# Altium PCB FEV-60_LED_Panel.PcbDoc
Units mil, origin at the board's own origin, x right, y up, seen from the top; angles counter-clockwise.
Board outline 5540 x 2365 mil, 2 copper layers (Top Layer, Bottom Layer); 50 components, 31 nets, 113 pads, 25 vias.
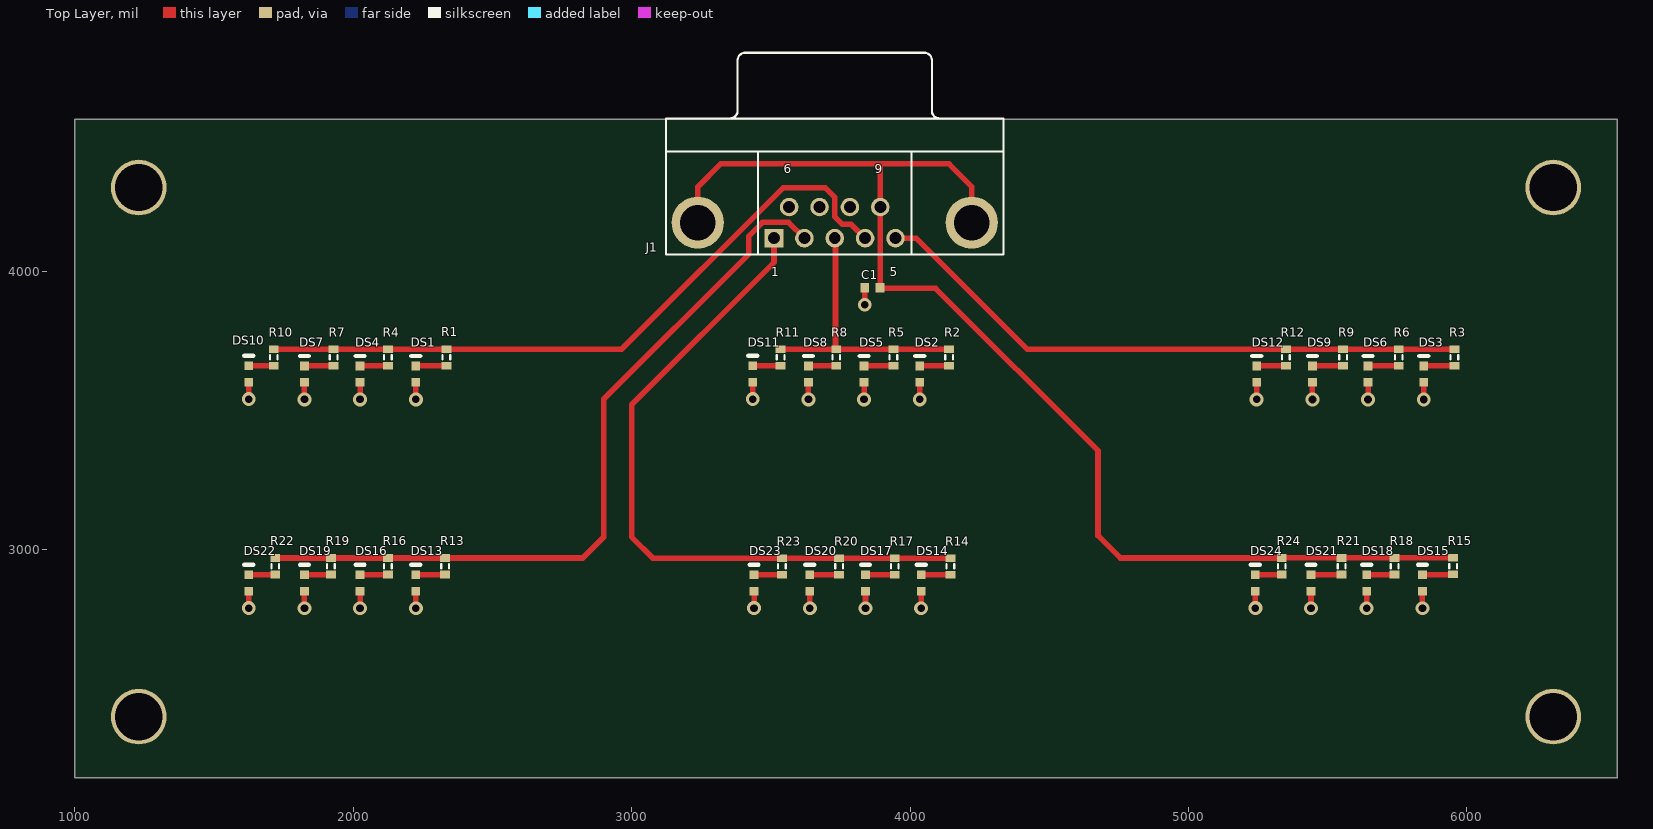
[diagram p0: Top Layer view]
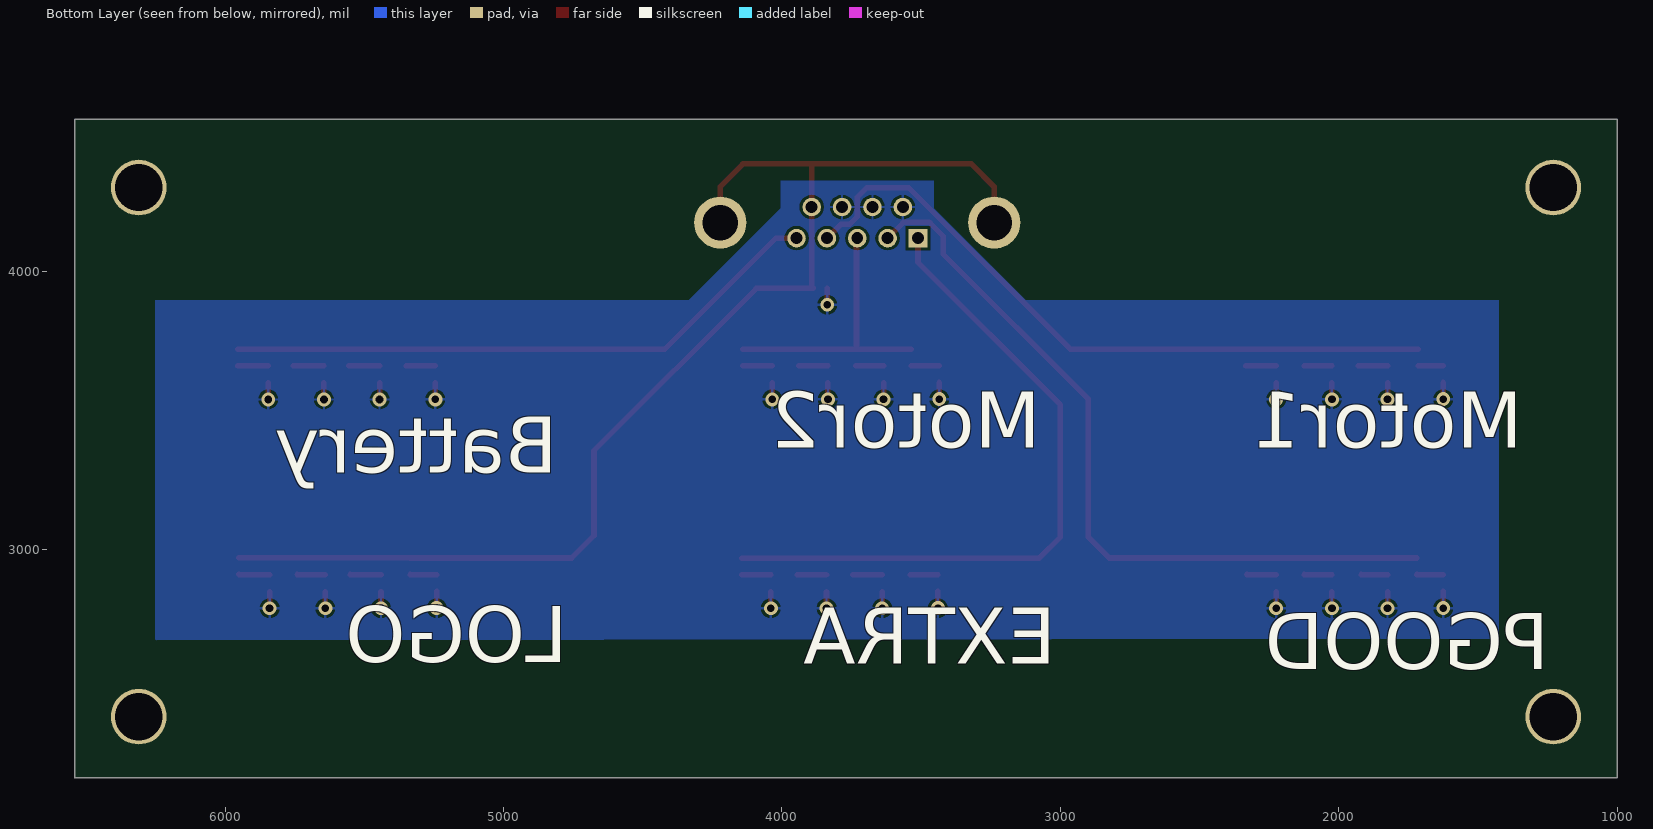
[diagram p1: Bottom Layer view, seen from below]

## Layer stack, top to bottom
Top Solder: solder mask 0.4, Solder Resist, Dk 3.5
Top Layer: signal copper 1.4
Dielectric 1: dielectric 12.6, FR-4, Dk 4.8
Bottom Layer: signal copper 1.4
Bottom Solder: solder mask 0.4, Solder Resist, Dk 3.5

## Board outline
1000,2180 1000,4545 6540,4545 6540,2180

## Design rules (kind name [scope] priority, off if disabled: settings)
Clearance [All] p1: gap=10 ignorepadtopadclearanceinfootprint=FALSE except(0: Arc-Hole Track-Hole SMDPad-Hole THPad-Hole Via-Hole Fill-Hole Poly-Hole Region-Hole Text-Hole)
PolygonConnect [All] p1: connectstyle=Relief reliefconductorwidth=10 reliefentries=4 polygonreliefangle="90 Angle" airgapwidth=10
RoutingVias [All] p1: holewidth=28 width=50 viastyle="Through Hole" minholewidth=28 minwidth=50 maxholewidth=28 maxwidth=50
SolderMaskExpansion [All] p1: expansion=4
Width [All] p1: maxlimit=50 minlimit=10 preferedwidth=20
30 further rules are at their usual default settings.

## Components (designator, comment, footprint, x,y, rotation, side; value= is the part's Value field where it differs from the comment)
C1 "Cap Semi" 1608[0603] 3865,3940 r180 top value=10uF
DS1 "HSMS-C190" AVAG-HSMX-C190_V 2225,3630 r90 top
DS2 "HSMS-C190" AVAG-HSMX-C190_V 4035,3630 r90 top
DS3 "HSMS-C190" AVAG-HSMX-C190_V 5845,3630 r90 top
DS4 "HSMS-C190" AVAG-HSMX-C190_V 2025,3630 r90 top
DS5 "HSMS-C190" AVAG-HSMX-C190_V 3835,3630 r90 top
DS6 "HSMS-C190" AVAG-HSMX-C190_V 5645,3630 r90 top
DS7 "HSMS-C190" AVAG-HSMX-C190_V 1825,3630 r90 top
DS8 "HSMS-C190" AVAG-HSMX-C190_V 3635,3630 r90 top
DS9 "HSMS-C190" AVAG-HSMX-C190_V 5445,3630 r90 top
DS10 "HSMS-C190" AVAG-HSMX-C190_V 1625,3630.47 r90 top
DS11 "HSMS-C190" AVAG-HSMX-C190_V 3435,3630.47 r90 top
DS12 "HSMS-C190" AVAG-HSMX-C190_V 5245,3630 r90 top
DS13 "HSMS-C190" AVAG-HSMX-C190_V 2225,2880 r90 top
DS14 "HSMS-C190" AVAG-HSMX-C190_V 4040,2880 r90 top
DS15 "HSMS-C190" AVAG-HSMX-C190_V 5840,2880 r90 top
DS16 "HSMS-C190" AVAG-HSMX-C190_V 2025,2880 r90 top
DS17 "HSMS-C190" AVAG-HSMX-C190_V 3840,2880 r90 top
DS18 "HSMS-C190" AVAG-HSMX-C190_V 5640,2880 r90 top
DS19 "HSMS-C190" AVAG-HSMX-C190_V 1825,2880 r90 top
DS20 "HSMS-C190" AVAG-HSMX-C190_V 3640,2880 r90 top
DS21 "HSMS-C190" AVAG-HSMX-C190_V 5440,2880 r90 top
DS22 "HSMS-C190" AVAG-HSMX-C190_V 1625,2880 r90 top
DS23 "HSMS-C190" AVAG-HSMX-C190_V 3440,2880 r90 top
DS24 "HSMS-C190" AVAG-HSMX-C190_V 5240,2880 r90 top
J1 "D Connector 9" DSUB1.385-2H9 3729.53,4548.11 r0 top
R1 "Res3" J1-0603 2335,3690 r90 top value=1K
R2 "Res3" J1-0603 4140,3690 r90 top value=1K
R3 "Res3" J1-0603 5955,3690 r90 top value=1K
R4 "Res3" J1-0603 2125,3690 r90 top value=1K
R5 "Res3" J1-0603 3940,3690 r90 top value=1K
R6 "Res3" J1-0603 5755,3690 r90 top value=1K
R7 "Res3" J1-0603 1930,3690 r90 top value=1K
R8 "Res3" J1-0603 3735,3690 r90 top value=1K
R9 "Res3" J1-0603 5555,3690 r90 top value=1K
R10 "Res3" J1-0603 1715,3690 r90 top value=1K
R11 "Res3" J1-0603 3535,3690 r90 top value=1K
R12 "Res3" J1-0603 5350,3690 r90 top value=1K
R13 "Res3" J1-0603 2330,2940 r90 top value=1K
R14 "Res3" J1-0603 4145,2939.53 r90 top value=1K
R15 "Res3" J1-0603 5950,2940.47 r90 top value=1K
R16 "Res3" J1-0603 2125,2940 r90 top value=1K
R17 "Res3" J1-0603 3945,2939.53 r90 top value=1K
R18 "Res3" J1-0603 5740,2940 r90 top value=1K
R19 "Res3" J1-0603 1920,2940 r90 top value=1K
R20 "Res3" J1-0603 3745,2939.53 r90 top value=1K
R21 "Res3" J1-0603 5550,2940 r90 top value=1K
R22 "Res3" J1-0603 1720,2940 r90 top value=1K
R23 "Res3" J1-0603 3540,2939.53 r90 top value=1K
R24 "Res3" J1-0603 5335,2940 r90 top value=1K

## Footprints (in the part's own frame and the unit in brackets; to place one, negate y for a bottom-side part, rotate by r counter-clockwise, add the part's x,y. Pads: shape width x height; smd on the part's side, far side on the other; paste and mask are expansions set on the pad)
1608[0603] [mm] "Chip Capacitor, Body 1.6x0.8mm, IPC High Density"
  rect 0.8x0.9 smd: 1(-0.7,0) 2(0.7,0)
  body extent -0.87,-0.48 0.87,0.48, height 1.3
AVAG-HSMX-C190_V [mm] "SMD, 2-Leads, Body 1.6x0.8mm, Height 0.9mm"
  rect 0.8x0.8 smd: 1(-0.75,0) 2(0.75,0)
  silkscreen extent 1.65,-0.4 1.65,0.4, body extent -0.8,-0.4 0.8,0.4, height 0.9
DSUB1.385-2H9 [mm] "Connector; D Subminiature; 9 Position; Right Angle; Pitch 1.385 mm"
  rect 1.69x1.69 hole 1.09: 1(-5.54,-10.92)
  round 1.69 hole 1.09: 2(-2.77,-10.92) 3(0,-10.92) 4(2.77,-10.92) 5(5.54,-10.92) 6(-4.155,-8.08) 7(-1.385,-8.08) 8(1.385,-8.08) 9(4.155,-8.08)
  round 4.76 hole 3.26: 10(-12.495,-9.5) 11(12.495,-9.5)
  silkscreen extent -15.4,-12.4 15.4,6
J1-0603 [mm] "Chip Resistor, Body 1.6x0.8mm, IPC High Density"
  rect 0.7x0.9 smd: 1(-0.75,0) 2(0.75,0)
  silkscreen extent -0.2,-0.35 0.2,0.35, body extent -0.85,-0.48 0.85,0.48, height 0.9

## Part data
C1: "Capacitor (Semiconductor SIM Model)", LatestRevisionDate=29-May-2009, LatestRevisionNote="IPC-7351 Footprint Added.", PackageDescription="Chip Capacitor", PackageReference=C1206, Published=8-Jun-2000, Publisher="Altium Limited"
DS1 DS2 DS3 DS4 DS5 DS6 DS7 DS8 DS9 DS10 DS11 DS12 DS13 DS14 DS15 DS16 DS17 DS18 DS19 DS20 DS21 DS22 DS23 DS24: library part CMP-2000-06427-1, "LED Uni-Color Red, 52 mW, 20 mA, -40 to 85 degC, 2-Pin SMD, RoHS, Tape and Reel", Emitting Color=Red, Forward Current=25mA, Forward Voltage=2.6V, Manufacturer=Avago, Operating Temperature Classification=Industrial, Operating Temp Range=-40Cto85C, Package Description="2-Pin Surface Mount Device, Body 1.6 x 0.8 mm, Height 0.9 mm", Package Reference=HSMX-C190, Package Type=ChipLed, Power Dissipation=52W, Reverse Voltage=5V, Test Current (It)=20mA, Chip Material=GaP, Datasheet URL=http://docs.avagotech.com/docs/AV02-0551EN, Datasheet Version=03/2012, DELETED=Compliant, Dominant Wave Length=626nm, High Brightness=No, Lens Dimensions=1x0.8x0.5mm, Lens Type=ColorlessDiffused, Luminous Intensity=10mcd, Lum Intensity=10mcd, Main Category=ChipLED, Manufacturer URL=http://www.avagotech.com/, Mounting=SurfaceMount, Mounting Technology=SurfaceMount, Number of  Elements=1, Packaging=TapeandReel, Peak Wavelength=630nm, Pin Count=2, Product Depth (mm)=0.8mm, Product Height (mm)=0.8mm, Product Length (mm)=1.6mm, Rad Hardened=No, Shape Type=Rectangular, Type=Uni-Color, Viewing Angle=170deg
J1: "Receptacle Assembly, 9 Position, Right Angle", PackageDocument=O, DatasheetDocument=1-Sep-1999, Gender=Receptacle, LatestRevisionDate=17-Jul-2002, LatestRevisionNote="Re-released for DXP Platform.", Orientation="Right Angle", PackageReference=788750, Positions=9, Published=15-Jun-2001, Publisher="Altium Limited"
R1 R2 R3 R4 R5 R6 R7 R8 R9 R10 R11 R12 R13 R14 R15 R16 R17 R18 R19 R20 R21 R22 R23 R24: "Resistor", LatestRevisionDate=29-May-2009, LatestRevisionNote="IPC-7351 Footprint Added.", PackageDescription="Chip Resistor", PackageReference=J1-0603, Published=8-Jun-2000, Publisher="Altium Limited"

## Free pads (board coordinates)
  round 200 hole 170: 2(1230,2400) 2(1230,4300) 2(6310,2400) 2(6310,4300)

## Via types
v1: diameter 50, hole 28, Top Layer to Bottom Layer, 25 vias

## Nets (pads, with @x,y where several pads share a name; then routed paths per layer and width w, separated by ;. In a path a pad name is that pad's centre, name@x,y a point inside that pad or via, vN(x,y) a via of type N, cw(c..) or ccw(c..) an arc to the next point about the centre after c; other vN are vias at no path point)
+5: C1.2 DS1.1 DS2.1 DS3.1 DS4.1 DS5.1 DS6.1 DS7.1 DS8.1 DS9.1 DS10.1 DS11.1 DS12.1 DS13.1 DS14.1 DS15.1 DS16.1 DS17.1 DS18.1 DS19.1 DS20.1 DS21.1 DS22.1 DS23.1 DS24.1 J1.6 J1.7 J1.8 | length 1500
  Top Layer w20: v1(1625,2789.53) DS22.1@1625,2849.53 ; v1(1625,3540) DS10.1@1625,3600 ; v1(1824.99,2789.06) DS19.1@1824.99,2849.06 ; v1(1825,3539.53) DS7.1@1825,3599.53 ; v1(2024.99,2789.06) DS16.1@2024.99,2849.06 ; v1(2025,3539.53) DS4.1@2025,3599.53 ; v1(2224.99,2789.06) DS13.1@2224.99,2849.06 ; v1(2225,3539.53) DS1.1@2225,3599.53 ; v1(3435,3540) DS11.1@3435,3600 ; v1(3440,2789.53) DS23.1@3440,2849.53 ; v1(3635,3539.53) DS8.1@3635,3599.53 ; v1(3639.99,2789.06) DS20.1@3639.99,2849.06 ; v1(3835,3539.53) DS5.1@3835,3599.53 ; v1(3837.44,3879.06) C1.2@3837.44,3939.06 ; v1(3839.99,2789.06) DS17.1@3839.99,2849.06 ; v1(4035,3539.53) DS2.1@4035,3599.53 ; v1(4039.99,2789.06) DS14.1@4039.99,2849.06 ; v1(5239.99,2789.53) DS24.1@5239.99,2849.53 ; v1(5244.99,3539.53) DS12.1@5244.99,3599.53 ; v1(5439.99,2789.06) DS21.1@5439.99,2849.06 ; v1(5444.99,3539.06) DS9.1@5444.99,3599.06 ; v1(5639.99,2789.06) DS18.1@5639.99,2849.06 ; v1(5644.99,3539.06) DS6.1@5644.99,3599.06 ; v1(5839.99,2789.06) DS15.1@5839.99,2849.06 ; v1(5844.99,3539.06) DS3.1@5844.99,3599.06
BATTERY: J1.5 R3.2 R6.2 R9.2 R12.2 | length 2172.5
  Top Layer w20: J1.5 4021.81,4118.19 4420.47,3719.53 R12.2 R9.2 R6.2 R3.2
EXTRA: J1.1 R14.2 R17.2 R20.2 R23.2 | length 2461.5
  Top Layer w20: J1.1 3511.42,4031.42 3000,3520 3000,3045 3075.94,2969.06 R23.2 R20.2 R17.2 R14.2
GND: C1.1 J1.9 J1.10 J1.11 R15.2 R18.2 R21.2 R24.2 | length 4397.2
  Top Layer w20: J1.10 3237.6,4302.6 3320,4385 3893.11,4385 ; C1.1@3887.56,3940 3887.56,3938.03 4091.97,3938.03 4675,3355 4675,3050 4755.47,2969.53 R24.2 5335.24,2969.76 5949.76,2969.76 R15.2 ; C1.1@3893.11,3941.89 J1.9 3893.11,4385 ; J1.11 4221.46,4303.54 4140,4385 3893.11,4385
MOTOR_1: J1.4 R1.2 R4.2 R7.2 R10.2 | length 2480.3
  Top Layer w20: R10.2 R7.2 R4.2 R1.2 2964.53,3719.53 3545,4300 3695,4300 3730,4265 3730,4195 3757.09,4167.91 3788.86,4167.91 J1.4
MOTOR_2: J1.3 R2.2 R5.2 R8.2 R11.2 | length 1005.9
  Top Layer w20: R11.2 R8.2 ; J1.3 3732.26,4115.45 3732.26,3722.26 R8.2 ; R2.2 R5.2 R8.2
NetDS1_2: DS1.2 R1.1 | length 110.4
  Top Layer w20: DS1.2 2225.47,3660 2334.53,3660 R1.1
NetDS2_2: DS2.2 R2.1 | length 105.4
  Top Layer w20: DS2.2 4035.47,3660 4139.53,3660 R2.1
NetDS3_2: DS3.2 R3.1 | length 110.4
  Top Layer w20: DS3.2 5845.46,3660 5954.53,3660 R3.1
NetDS4_2: DS4.2 R4.1 | length 100.4
  Top Layer w20: DS4.2 2025.47,3660 2124.53,3660 R4.1
NetDS5_2: DS5.2 R5.1 | length 105.4
  Top Layer w20: DS5.2 3835.47,3660 3939.53,3660 R5.1
NetDS6_2: DS6.2 R6.1 | length 110.4
  Top Layer w20: DS6.2 5645.46,3660 5754.53,3660 R6.1
NetDS7_2: DS7.2 R7.1 | length 105.4
  Top Layer w20: DS7.2 1825.47,3660 1929.53,3660 R7.1
NetDS8_2: DS8.2 R8.1 | length 100.4
  Top Layer w20: DS8.2 3635.47,3660 3734.53,3660 R8.1
NetDS9_2: DS9.2 R9.1 | length 110.4
  Top Layer w20: DS9.2 5445.46,3660 5554.53,3660 R9.1
NetDS10_2: DS10.2 R10.1 | length 90.2
  Top Layer w20: DS10.2 1625.24,3660.24 1714.76,3660.24 R10.1
NetDS11_2: DS11.2 R11.1 | length 100.2
  Top Layer w20: DS11.2 3435.24,3660.24 3534.76,3660.24 R11.1
NetDS12_2: DS12.2 R12.1 | length 105.4
  Top Layer w20: DS12.2 5245.46,3660 5349.53,3660 R12.1
NetDS13_2: DS13.2 R13.1 | length 105.4
  Top Layer w20: DS13.2 2225.47,2910 2329.53,2910 R13.1
NetDS14_2: DS14.2 R14.1 | length 105.2
  Top Layer w20: DS14.2 4040.23,2909.77 4144.77,2909.77 R14.1
NetDS15_2: DS15.2 R15.1 | length 110.6
  Top Layer w20: DS15.2 5840.7,2910.24 5949.29,2910.24 R15.1
NetDS16_2: DS16.2 R16.1 | length 100.4
  Top Layer w20: DS16.2 2025.47,2910 2124.53,2910 R16.1
NetDS17_2: DS17.2 R17.1 | length 105.2
  Top Layer w20: DS17.2 3840.23,2909.77 3944.77,2909.77 R17.1
NetDS18_2: DS18.2 R18.1 | length 100.4
  Top Layer w20: DS18.2 5640.46,2910 5739.53,2910 R18.1
NetDS19_2: DS19.2 R19.1 | length 95.4
  Top Layer w20: DS19.2 1825.47,2910 1919.53,2910 R19.1
NetDS20_2: DS20.2 R20.1 | length 105.2
  Top Layer w20: DS20.2 3640.23,2909.77 3744.77,2909.77 R20.1
NetDS21_2: DS21.2 R21.1 | length 110.4
  Top Layer w20: DS21.2 5440.46,2910 5549.53,2910 R21.1
NetDS22_2: DS22.2 R22.1 | length 95.4
  Top Layer w20: DS22.2 1625.47,2910 1719.53,2910 R22.1
NetDS23_2: DS23.2 R23.1 | length 100.2
  Top Layer w20: DS23.2 3440.23,2909.77 3539.77,2909.77 R23.1
NetDS24_2: DS24.2 R24.1 | length 95.4
  Top Layer w20: DS24.2 5240.46,2910 5334.53,2910 R24.1
PGOOD: J1.2 R13.2 R16.2 R19.2 R22.2 | length 2751.4
  Top Layer w20: R22.2 R19.2 R16.2 R13.2 2824.53,2969.53 2900,3045 2900,3540 3420,4060 3420,4125 3470,4175 3563.66,4175 J1.2

## Polygon pours and split planes (outlines as drawn)
+5 on Bottom Layer "Bottom Layer-No Net" (solid, pour order 0): 1425,2680 1425,3895 3125,3895 3455,4225 3455,4325 4005,4325 4005,4225 4335,3895 6250,3895 6250,2675

## Silkscreen, mask and mechanical layers (free items; w line width, h text height)
Bottom Overlay:
  text "Motor1" at 1340,3365 h200
  text "Motor2" at 3070,3365 h200
  text "Battery" at 4805,3275 h200
  text "LOGO" at 4770,2595 h200
  text "EXTRA" at 3015,2590 h200
  text "PGOOD" at 1245,2570 h200
Mechanical 1:
  the board outline again, w10
Mechanical 15:
  lines w10: 1000.47,3630.47 1625,3630 ; 2225,2180 2225,2880 2225,3630 2225,4545 ; 2225.47,3630.47 3435,3630.47 ; 4035,3630 5245,3630 ; 5954.99,3690.01 6580,3690

## Text inside footprints (layer, text, board x,y; h text height)
J1: Top Overlay "6" at 3546.26,4352.24 h32; Top Overlay "9" at 3873.43,4352.24 h32; Top Overlay "5" at 3927.95,3982.17 h32; Top Overlay "1" at 3501.57,3982.17 h32